# Altium PCB PULSE COUNTER.PcbDoc
Units mm, origin at the board's own origin, x right, y up, seen from the top; angles counter-clockwise.
Board outline 50 x 35 mm, 2 copper layers (Top Layer, Bottom Layer), stack 1.071 mm thick; 54 components, 28 nets, 139 pads, 17 vias.
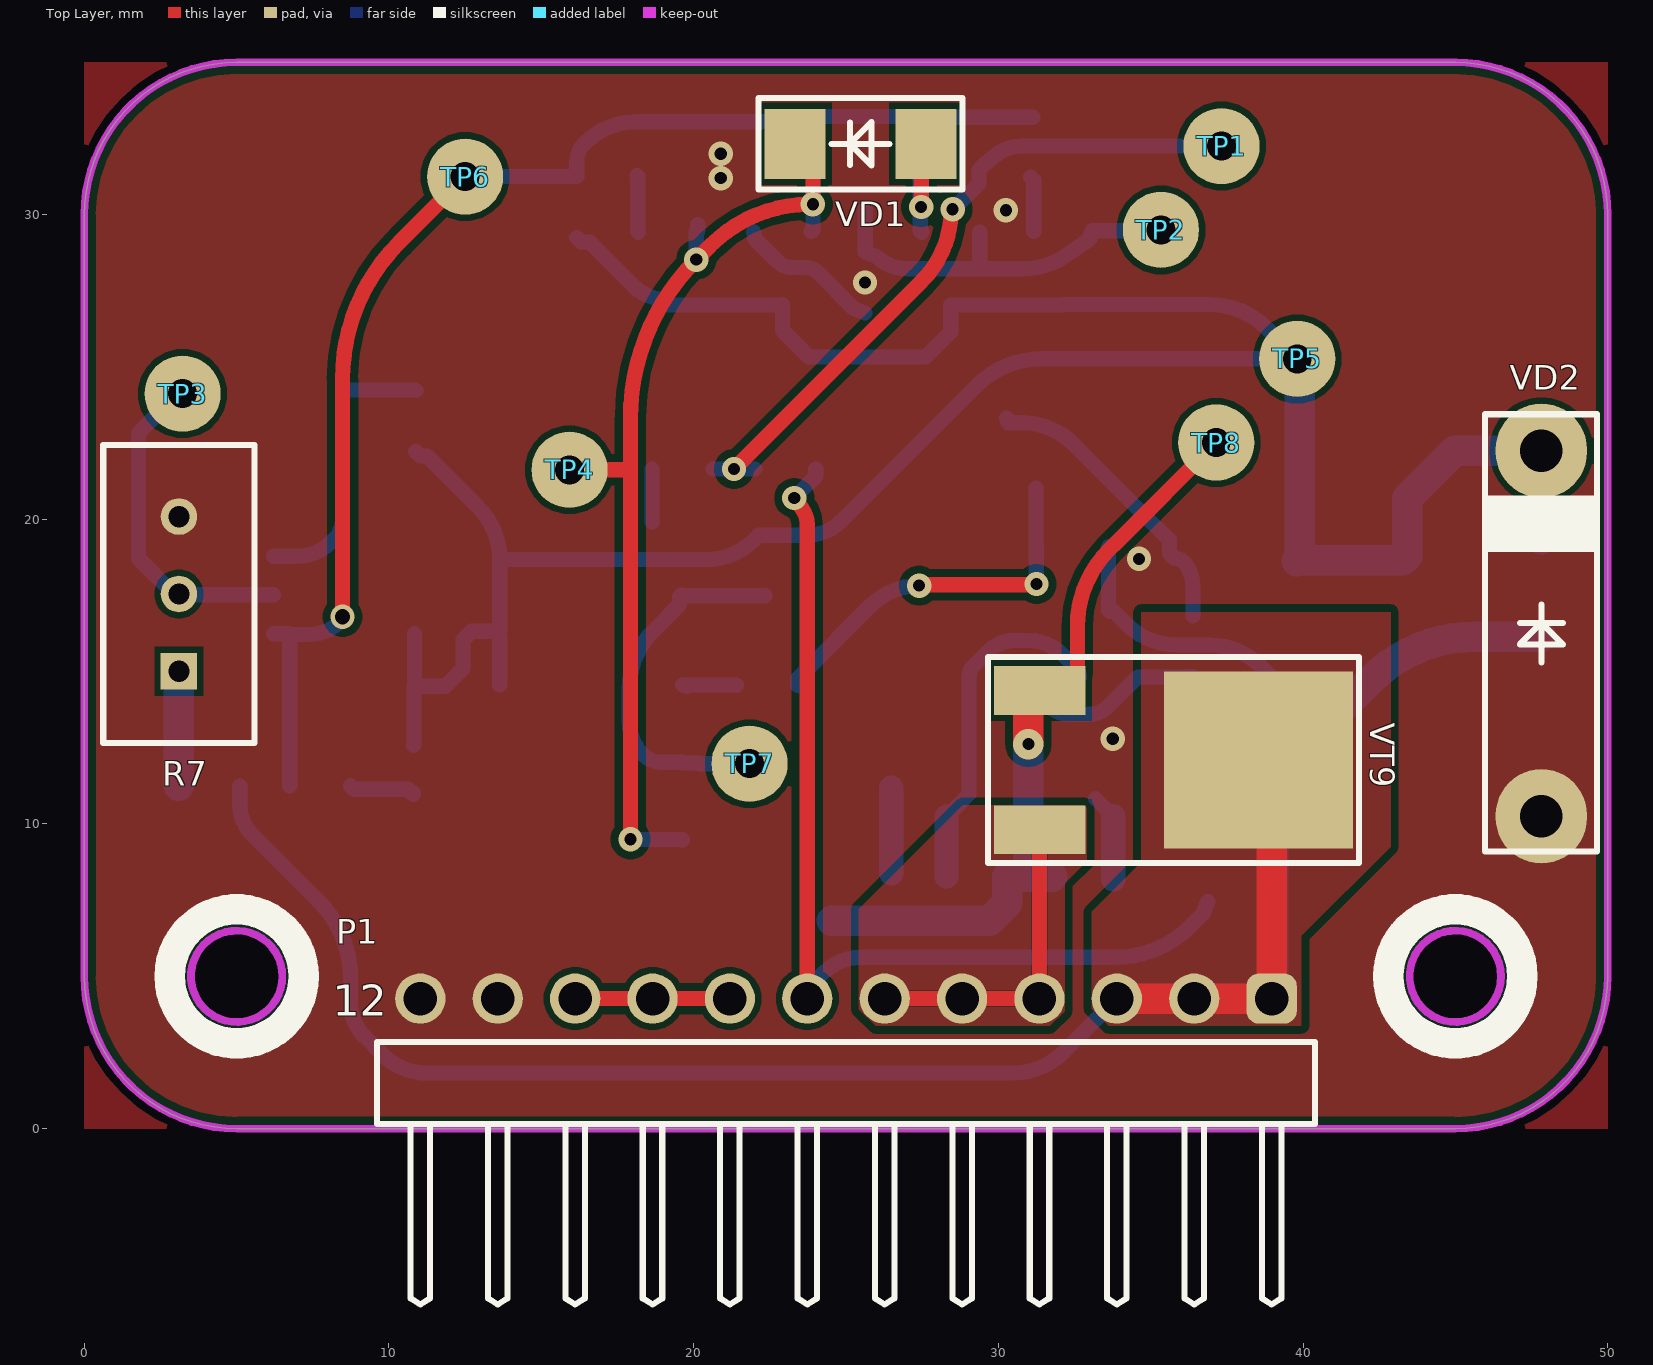
[diagram p0: Top Layer view]
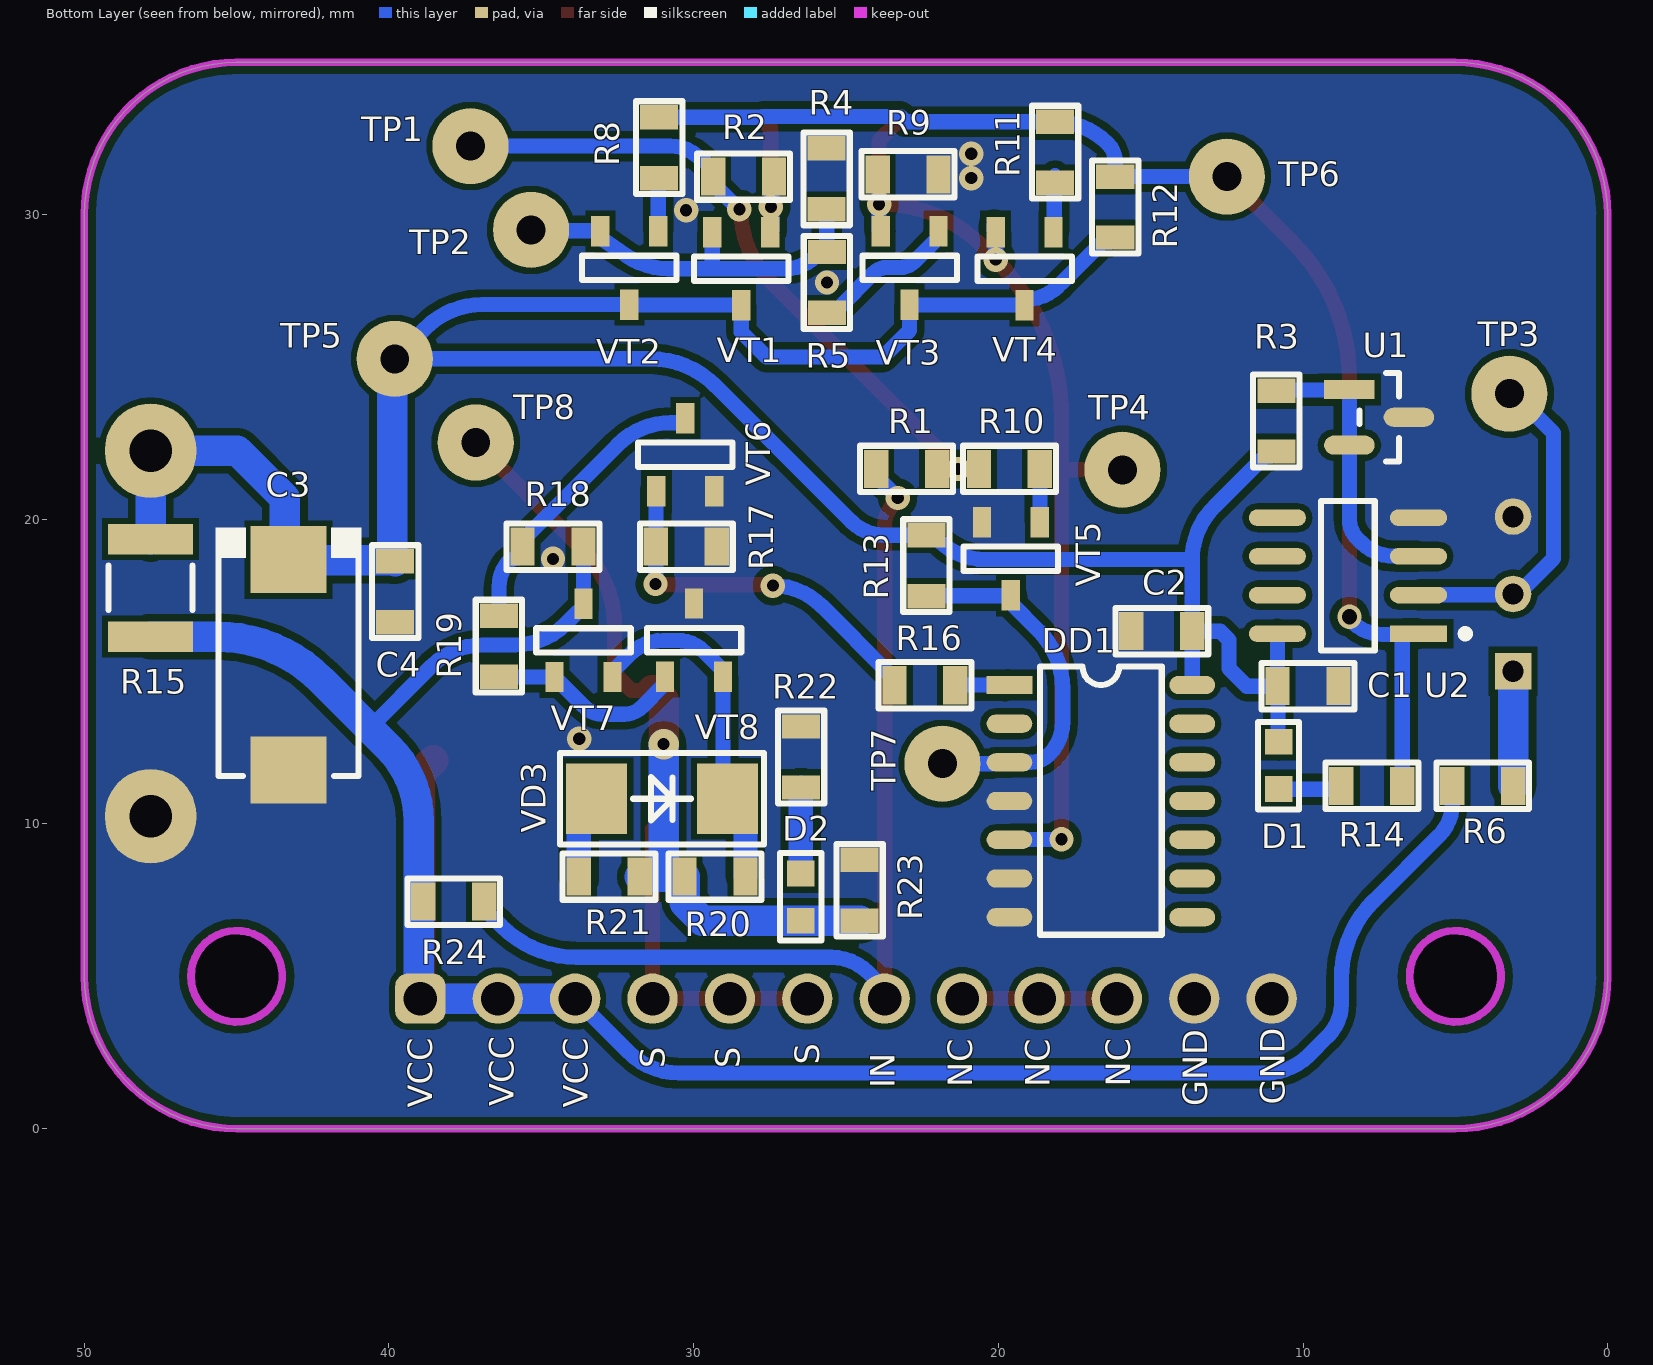
[diagram p1: Bottom Layer view, seen from below]
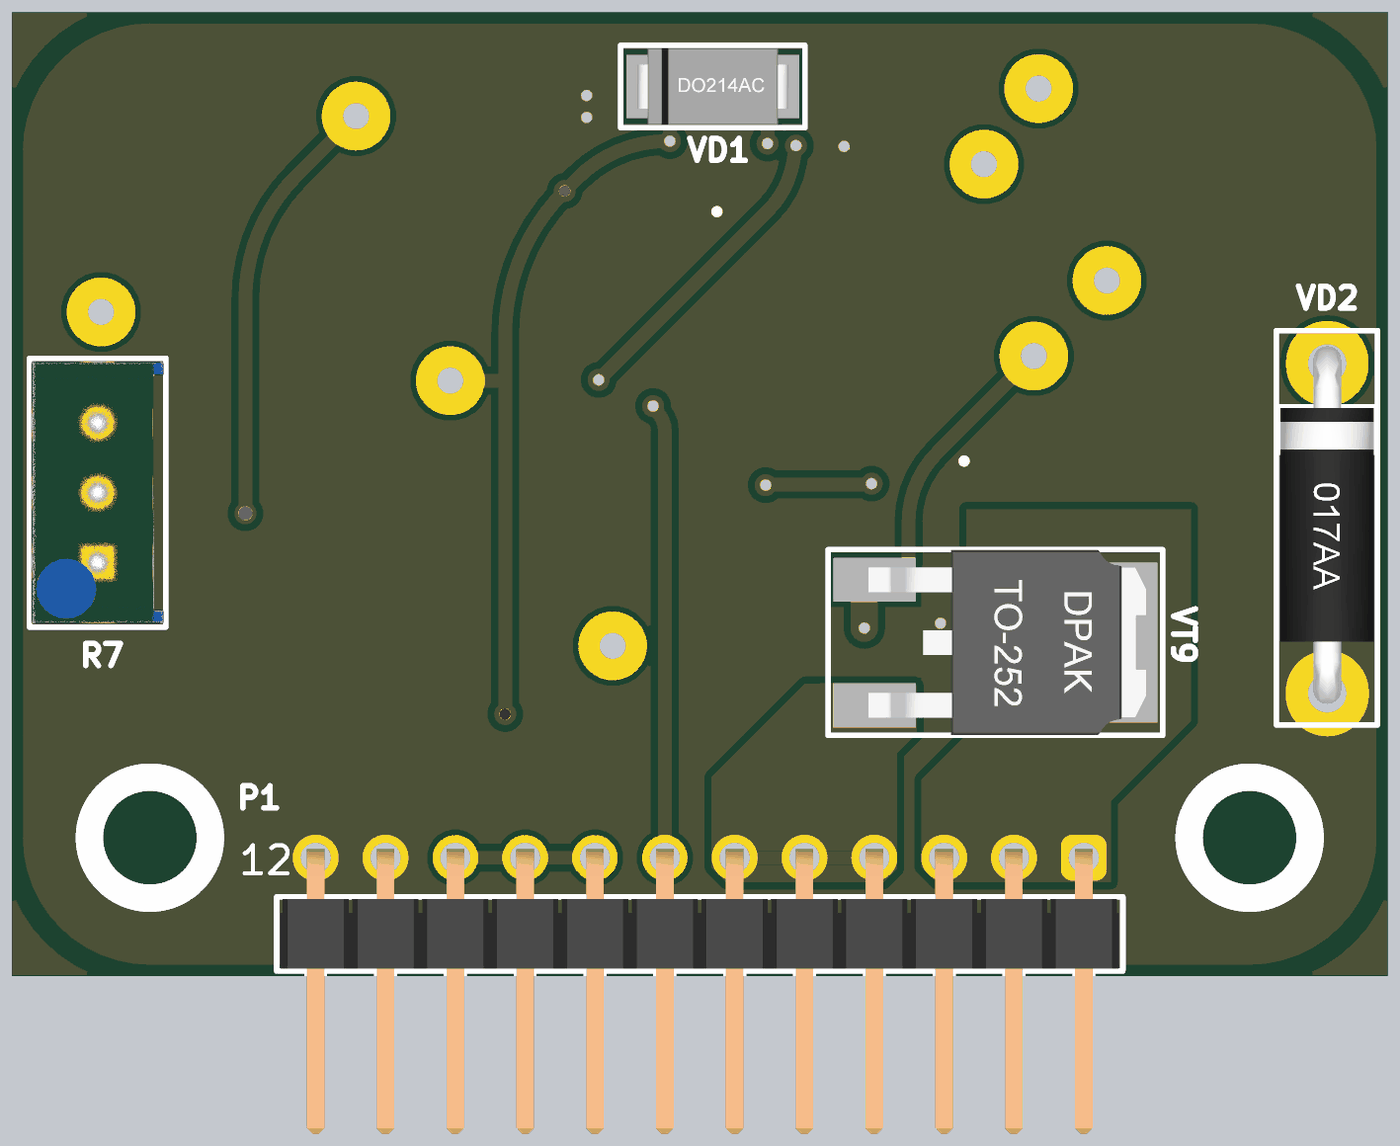
[diagram p2: 3D render of the assembled board from above, using the file's embedded part models]
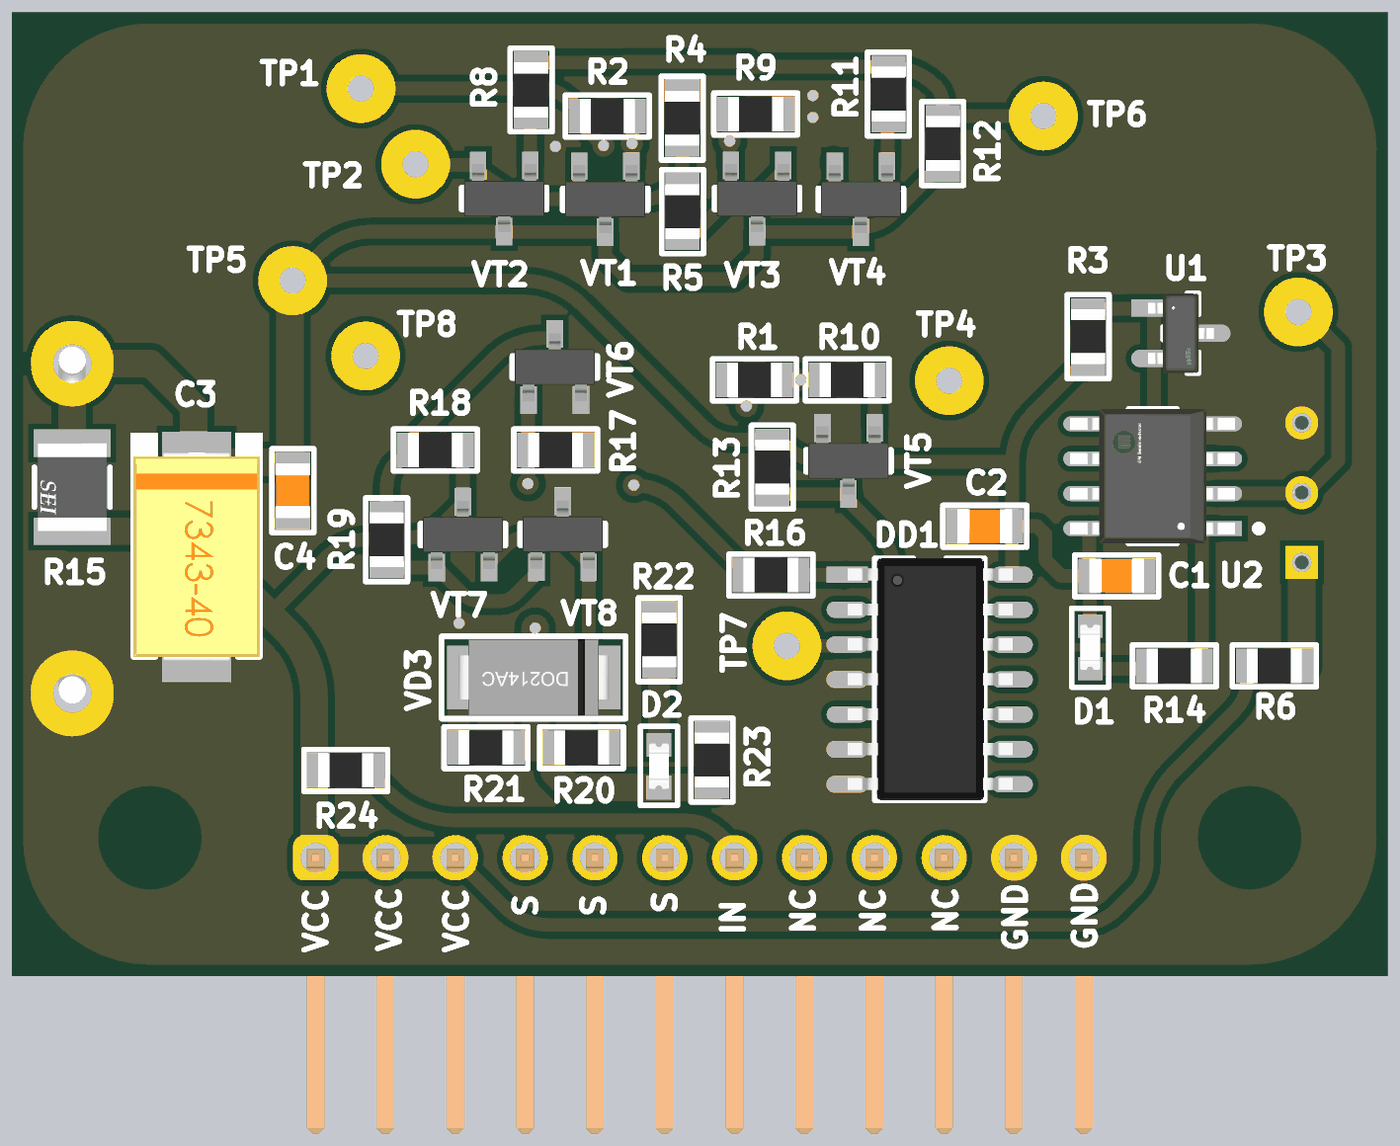
[diagram p3: 3D render of the assembled board from below, using the file's embedded part models]

## Layer stack, top to bottom
Top Solder: solder mask 0.0102, Solder Resist, Dk 3.5
Top Layer: signal copper 0.0356
Dielectric 1: dielectric 1, FR-4, Dk 4.8
Bottom Layer: signal copper 0.0356
Bottom Solder: solder mask 0.0102, Solder Resist, Dk 3.5

## Board outline
0,5 0,30 cw(c5,30) 5,35 45.021,35 45,35 cw(c45,30) 50,30 50,5 cw(c45,5) 45,0 5,0 cw(c5,5)
cut-out: 43.5,5 ccw(c45,5) 45,3.5 ccw(c45,5) 46.5,5 ccw(c45,5) 45,6.5 ccw(c45,5)
cut-out: 3.5,5 ccw(c5,5) 5,3.5 ccw(c5,5) 6.5,5 ccw(c5,5) 5,6.5 ccw(c5,5)

## Design rules (kind name [scope] priority, off if disabled: settings)
Clearance Clearance_1 [All vs InNet('GND_1')] p1: gap=0.2 ignorepadtopadclearanceinfootprint=FALSE
Clearance [All vs InNet('GND')] p2: gap=0.25 ignorepadtopadclearanceinfootprint=FALSE except(0.2: SMDPad-SMDPad SMDPad-THPad SMDPad-Via SMDPad-Fill SMDPad-Poly SMDPad-Region SMDPad-Text SMDPad-Hole THPad-THPad THPad-Via THPad-Fill THPad-Poly THPad-Region THPad-Text THPad-Hole Text-Text Text-Hole)
ComponentClearance [All] p1: gap=-3 collisioncheckmode=3 verticalgap=0.254 showdistances=FALSE
DiffPairsRouting [All] p1: maxlimit=0.254 minlimit=0.254 mostfreqgap=0.254 substack1={A23D90DD-733B-49C5-8102-56B3D284E3A0} toplayer_{a23d90dd-733b-49c5-8102-56b3d284e3a0}_minwidth=0.381 toplayer_{a23d90dd-733b-49c5-8102-56b3d284e3a0}_maxwidth=0.381 toplayer_{a23d90dd-733b-49c5-8102-56b3d284e3a0}_prefwidth=0.381 bottomlayer_{a23d90dd-733b-49c5-8102-56b3d284e3a0}_minwidth=0.381 bottomlayer_{a23d90dd-733b-49c5-8102-56b3d284e3a0}_maxwidth=0.381 bottomlayer_{a23d90dd-733b-49c5-8102-56b3d284e3a0}_prefwidth=0.381 toplayer_minwidth=0.381 toplayer_maxwidth=0.381 toplayer_prefwidth=0.381 bottomlayer_minwidth=0.381 bottomlayer_maxwidth=0.381 bottomlayer_prefwidth=0.381 substack2={0B3DB408-A969-412D-8C07-BA8AE97219D9} toplayer_{0b3db408-a969-412d-8c07-ba8ae97219d9}_minwidth=0.381 toplayer_{0b3db408-a969-412d-8c07-ba8ae97219d9}_maxwidth=0.381 toplayer_{0b3db408-a969-412d-8c07-ba8ae97219d9}_prefwidth=0.381 bottomlayer_{0b3db408-a969-412d-8c07-ba8ae97219d9}_minwidth=0.381 bottomlayer_{0b3db408-a969-412d-8c07-ba8ae97219d9}_maxwidth=0.381 bottomlayer_{0b3db408-a969-412d-8c07-ba8ae97219d9}_prefwidth=0.381 substack3={378827E6-B38F-4565-9D2F-710D8D441C30} toplayer_{378827e6-b38f-4565-9d2f-710d8d441c30}_minwidth=0.381 toplayer_{378827e6-b38f-4565-9d2f-710d8d441c30}_maxwidth=0.381 toplayer_{378827e6-b38f-4565-9d2f-710d8d441c30}_prefwidth=0.381 bottomlayer_{378827e6-b38f-4565-9d2f-710d8d441c30}_minwidth=0.381 bottomlayer_{378827e6-b38f-4565-9d2f-710d8d441c30}_maxwidth=0.381 bottomlayer_{378827e6-b38f-4565-9d2f-710d8d441c30}_prefwidth=0.381 substack4={1E65D4A7-266F-4925-B814-5E9C4A66F8EE} toplayer_{1e65d4a7-266f-4925-b814-5e9c4a66f8ee}_minwidth=0.381 toplayer_{1e65d4a7-266f-4925-b814-5e9c4a66f8ee}_maxwidth=0.381 toplayer_{1e65d4a7-266f-4925-b814-5e9c4a66f8ee}_prefwidth=0.381 bottomlayer_{1e65d4a7-266f-4925-b814-5e9c4a66f8ee}_minwidth=0.381 bottomlayer_{1e65d4a7-266f-4925-b814-5e9c4a66f8ee}_maxwidth=0.381 bottomlayer_{1e65d4a7-266f-4925-b814-5e9c4a66f8ee}_prefwidth=0.381 substack5={93C5D03E-862D-45F8-9871-970EEA9B3F11} toplayer_{93c5d03e-862d-45f8-9871-970eea9b3f11}_minwidth=0.381 toplayer_{93c5d03e-862d-45f8-9871-970eea9b3f11}_maxwidth=0.381 toplayer_{93c5d03e-862d-45f8-9871-970eea9b3f11}_prefwidth=0.381 bottomlayer_{93c5d03e-862d-45f8-9871-970eea9b3f11}_minwidth=0.381 bottomlayer_{93c5d03e-862d-45f8-9871-970eea9b3f11}_maxwidth=0.381 bottomlayer_{93c5d03e-862d-45f8-9871-970eea9b3f11}_prefwidth=0.381 maxuncoupledlength=12.7
Height [All] p1: minheight=0 maxheight=50 prefheight=33
HoleSize [All] p1: absolutevalues=TRUE maxlimit=6 minlimit=0.01 maxpercent=80.000 minpercent=20.000
HoleToHoleClearance [All] p1: gap=0.1 allowstackedmicrovias=TRUE
MinimumSolderMaskSliver [All] p1: minsoldermaskwidth=0.1
PlaneClearance [All] p1: clearance=0.7
PlaneConnect [All] p1: planeconnectstyle=Direct reliefexpansion=0.5 reliefentries=4 reliefconductorwidth=0.5 reliefairgap=0.15
PolygonConnect VQFN20 [HasFootprint('VQFN20')] p1: connectstyle=Direct reliefconductorwidth=0.254 reliefentries=4 polygonreliefangle="90 Angle" airgapwidth=0.254
PolygonConnect [All] p2: connectstyle=Direct reliefconductorwidth=0.3 reliefentries=4 polygonreliefangle="90 Angle" airgapwidth=0.15
RoutingVias [All] p1: holewidth=0.1 width=0.1 viastyle="Through Hole" minholewidth=0 minwidth=0.3 maxholewidth=2 maxwidth=4
ShortCircuit [All] p1: allowed=TRUE
SilkToSolderMaskClearance [IsPad] p1: minsilkscreentomaskgap=0.1 clearancetoexposedcopper=TRUE
SolderMaskExpansion SolderMaskExpansion_Via [IsVia] p1: expansion=0.102 istentingtop=TRUE
SolderMaskExpansion [All] p2: expansion=0.01 istentingtop=FALSE
UnRoutedNet [All] p1: checkbadconnections=TRUE
Width [All] p1: maxlimit=5 minlimit=0.2 preferedwidth=0.3 substack1={A23D90DD-733B-49C5-8102-56B3D284E3A0} substack2={0B3DB408-A969-412D-8C07-BA8AE97219D9} substack3={378827E6-B38F-4565-9D2F-710D8D441C30} substack4={1E65D4A7-266F-4925-B814-5E9C4A66F8EE} substack5={93C5D03E-862D-45F8-9871-970EEA9B3F11}
19 further rules are at their usual default settings.

## Components (designator, comment, footprint, x,y, rotation, side; value= is the part's Value field where it differs from the comment)
C1 "0.1uF" CAP-0805 9.836,14.525 r0 bottom
C2 "0.1uF" CAP-0805 14.635,16.329 r180 bottom
C3 "CAP-POLAR" CAP-TAN-D 43.3,15.225 r270 bottom
C4 "0.1uF" CAP-0805 39.8,17.625 r90 bottom
D1 "151031YS06000" LED-0603 10.8,11.925 r270 bottom
D2 "151031YS06000" LED-0603 26.486,7.6 r90 bottom
DD1 "CD4013" SO14-150 16.635,10.754 r180 bottom
P1 "61301211021" 61301211021 25,1.5 r0 top locked
R1 "1K" RES-0805 23.01,21.654 r0 bottom
R2 "10K" RES-0805 28.363,31.25 r180 bottom
R3 "1K" RES-0805 10.875,23.225 r270 bottom
R4 "1K" RES-0805 25.638,31.175 r270 bottom
R5 "10K" RES-0805 25.626,27.775 r270 bottom
R6 "20K" RES-0805 4.1,11.25 r0 bottom
R7 "10K" Bourns_3296W_MFG 3.1,17.55 r0 top
R8 "10K" RES-0805 31.132,32.2 r270 bottom
R9 "1K" RES-0805 22.963,31.325 r0 bottom
R10 "10K" RES-0805 19.635,21.654 r180 bottom
R11 "10K" RES-0805 18.138,32.05 r270 bottom
R12 "1K" RES-0805 16.163,30.25 r270 bottom
R13 "1K" RES-0805 22.36,18.479 r90 bottom
R14 "470" RES-0805 7.739,11.252 r0 bottom
R15 "RMCF1210JT51R0" FP-RMCF1210-MFG 47.825,17.75 r270 bottom
R16 "1K" RES-0805 22.41,14.554 r0 bottom
R17 "20k" RES-0805 30.241,19.104 r0 bottom
R18 "1K" RES-0805 34.616,19.104 r0 bottom
R19 "1K" RES-0805 36.391,15.837 r90 bottom
R20 "47" RES-0805 29.3,8.275 r180 bottom
R21 "47" RES-0805 32.775,8.275 r0 bottom
R22 "2K" RES-0805 26.475,12.2 r270 bottom
R23 "1K" RES-0805 24.555,7.825 r270 bottom
R24 "10K" RES-0805 37.875,7.45 r0 bottom
TP1 "" Test_Point 37.325,32.25 r0 top
TP2 "" Test_Point 35.338,29.5 r0 top
TP3 "" Test_Point 3.225,24.125 r0 top
TP4 "" Test_Point 15.925,21.625 r0 top
TP5 "" Test_Point 39.811,25.268 r0 top
TP6 "" Test_Point 12.5,31.25 r0 top
TP7 "" Test_Point 21.833,11.979 r90 top
TP8 "" Test_Point 37.153,22.522 r0 top
U1 "TL431" TL431_SOT-23-3(A) 7.5,23.35 r180 bottom
U2 "LM393" FP-751-07-IPC_C 8.525,18.15 r0 bottom
VD1 "DIODE" "DO-214AC, SMA" 25.475,32.325 r0 top
VD2 "5V" DO-017AA 47.825,16.25 r270 top
VD3 "DIODE" "DO-214AC, SMA" 31.041,10.829 r0 bottom
VT1 "BC847-BEC" SOT23-3 28.438,28.225 r270 bottom
VT2 "BC847-BEC" SOT23-3 32.113,28.25 r270 bottom
VT3 "BC847-BEC" SOT23-3 22.913,28.25 r270 bottom
VT4 "BC847-BEC" SOT23-3 19.138,28.225 r270 bottom
VT5 "BC847-BEC" SOT23-3 19.588,18.708 r270 bottom
VT6 "BC847-BEC" SOT23-3 30.275,22.122 r90 bottom
VT7 "BC847-BEC" SOT23-3 33.616,16.025 r90 bottom
VT8 "BC857-BEC" SOT23-3 29.988,16.037 r90 bottom
VT9 "MOSFET-P-CH-DPAK" DPAK 34.95,12.1 r270 top

## Footprints (in the part's own frame and the unit in brackets; to place one, negate y for a bottom-side part, rotate by r counter-clockwise, add the part's x,y. Pads: shape width x height; smd on the part's side, far side on the other; paste and mask are expansions set on the pad)
61301211021 [mm] "Pin Header, pitch 2.54 mm, THT, Angled, single row, 12p"
  rrect50% 1.65x1.65 hole 1.1: 1(13.97,2.77)
  round 1.65 hole 1.1: 2(11.43,2.77) 3(8.89,2.77) 4(6.35,2.77) 5(3.81,2.77) 6(1.27,2.77) 7(-1.27,2.77) 8(-3.81,2.77) 9(-6.35,2.77) 10(-8.89,2.77) 11(-11.43,2.77) 12(-13.97,2.77)
  silkscreen extent -15.39,-7.27 15.39,1.35, body extent -15.24,-7.27 15.24,3.09, height 2.58
Bourns_3296W_MFG [mm]
  rect 1.2x1.2 hole 0.7 paste-2539.97 mask+0: 1(0.005,-2.54)
  round 1.2 hole 0.7 paste-2539.97 mask+0: 2(0.005,0) 3(0.005,2.54)
  silkscreen extent -2.48,-4.89 2.48,4.89, body extent -2.58,-4.99 2.58,4.99, height 0.25
CAP-0805 [mm]
  rect 0.8x1.25 smd mask+0.015: 1(-1,0) 2(1,0)
  silkscreen extent -1.52,-0.76 1.52,0.76, body extent -1,-0.62 1,0.63, height 0.8
CAP-TAN-D [mm]
  rect 2.2x2.5 smd: 1(-3.45,0) 2(3.45,0)
  silkscreen extent -4.5,-2.4 3.65,2.4, body extent -3.8,-2.3 3.8,2.3, height 4
DO-017AA [mm]
  oval 3.1x3 hole 1.4: 1(-6,0) 2(6,0)
  silkscreen extent -7.2,-1.85 7.15,1.83, body extent -6.63,-1.7 6.37,1.7, height 3.4
"DO-214AC, SMA" [mm]
  rect 2x2.3 smd: 1(-2.15,0) 2(2.15,0)
  silkscreen extent -3.35,-1.5 3.35,1.5, body extent -2.74,-1.4 2.74,1.4, height 2.24
DPAK [mm]
  rect 1.6x3 smd: 1(-2.285,-3.59) 3(2.285,-3.59)
  rect 5.8x6.2 smd: 4(0,3.59)
  silkscreen extent -3.37,-5.28 3.37,6.89, body extent -3.37,-3.81 3.37,6.29, height 2.37
FP-751-07-IPC_C [mm]
  rect 1.874x0.543 smd paste+0 mask+0: 1(-2.316,1.905)
  rrect100% 1.874x0.543 smd paste+0 mask+0: 2(-2.316,0.635) 3(-2.316,-0.635) 4(-2.316,-1.905) 5(2.316,-1.905) 6(2.316,-0.635) 7(2.316,0.635) 8(2.316,1.905)
  silkscreen extent -3.98,-2.45 0.88,2.45, body extent -3,-2.45 3,2.45, height 1.75
FP-RMCF1210-MFG [mm]
  rect 1x2.8 smd paste+0 mask+0: 1(-1.6,0) 2(1.6,0)
  silkscreen extent -0.72,-1.38 0.72,1.38, body extent -1.6,-1.25 1.6,1.25, height 0.7
LED-0603 [mm]
  rect 0.85x0.9 smd: 1(-0.775,0) 2(0.775,0)
  silkscreen extent -1.43,-0.67 1.45,0.67, body extent -0.82,-0.36 0.83,0.36, height 0.68
RES-0805 [mm]
  rect 0.8x1.25 smd mask+0.015: 1(-1,0) 2(1,0)
  silkscreen extent -1.52,-0.76 1.52,0.76, body extent -1,-0.62 1,0.63, height 0.6
SO14-150 [mm]
  rect 1.5x0.6 smd: 1(-3,3.81)
  oval 1.5x0.6 smd: 2(-3,2.54) 3(-3,1.27) 4(-3,0) 5(-3,-1.27) 6(-3,-2.54) 7(-3,-3.81) 8(3,-3.81) 9(3,-2.54) 10(3,-1.27) 11(3,0) 12(3,1.27) 13(3,2.54) 14(3,3.81)
  silkscreen extent -2,-4.39 2,4.41, body extent -2.97,-4.39 3.03,4.41, height 1.7
SOT23-3 [mm]
  rect 1x0.6 smd: 1(-1.2,0.95) 2(-1.2,-0.95) 3(1.2,0)
  silkscreen extent -0.4,-1.55 0.4,1.55, body extent -1.25,-1.46 1.23,1.46, height 1.02
Test_Point [mm]
  round 2.5 hole 0.95: 1(0,0)
TL431_SOT-23-3(A) [mm]
  rect 1.659x0.627 smd paste+0 mask+0: 1(-0.977,0.915)
  rrect100% 1.659x0.627 smd paste+0 mask+0: 2(-0.977,-0.915) 3(0.977,0)
  silkscreen extent -0.65,-1.45 0.65,1.45, body extent -1.2,-1.45 1.2,1.45, height 1.1

## Part data
C1 C2 C4: library part CAP-NON-POLAR
D1 D2: library part LED, "WURTH ELEKTRONIK - 151031YS06000 - LED, Yellow, Through Hole, T-1 (3mm), 30 mA, 2 V, 590 nm", Manufacturer_Name="Wurth Elektronik", Mouser Part Number=710-151031YS06000, Datasheet Link=https://katalog.we-online.de/led/datasheet/151031YS06000.pdf, Geometry.Height=5.5mm, Manufacturer_Part_Number=151031YS06000, Mouser Price/Stock=https://www.mouser.co.uk/ProductDetail/Wurth-Elektronik/151031YS06000?qs=LlUlMxKIyB3xSYYW%252BcuBiQ%3D%3D
P1: "WR-PHD Pin Header, THT, Angled, pitch 2.54mm, 1 Row, 12P", Contact Resistance=20mΩ, Manufacturer="Wurth Elektronik", Operating Temperature Max=105°C, Operating Temperature Min=-40°C, Rated Current=3A, Withstanding Voltage=500V, Working Voltage=250V, Category="Board-to-Board Connectors", ComponentLink1Description="Website Link", ComponentLink1URL=https://www.we-online.com/redexpert/article/61301211021?ad, ComponentLink2Description="Datasheet Link", ComponentLink2URL=https://www.we-online.com/redexpert/spec/61301211021?ad, Gender="Pin Header", Manufacturer Part Number=61301211021, Match Code=WR-PHD, Mount="Through Hole", Number of Pins=12, Number of Rows=1, Orientation=Angled, Packaging=Bag, Pitch=2.54mm
R1 R2 R3 R4 R5 R6 R8 R9 R10 R11 R12 R13 R22 R23 R24: library part RES-CONST
R7: library part RES_Adj
R14: library part RES-CONST, "1K"
R15: library part CMP-26527-006785-1, "51Ω ±5% 0.5W 1210 Thick Film Chip Resistor AEC-Q200 compliant", Case Code (Imperial)=1210, Case Code (Metric)=3225, Max Operating Temperature=155°C, Max Power Dissipation=500mW, Min Operating Temperature=-55°C, Resistance=51R, Resistor Type="Thick Film", Temperature Coefficient=200ppm/°C, Tolerance=5%, Case/Package=1210, Contact Plating=Tin, Features="Automotive AEC-Q200", Height=0.028inch, Lead Free="Lead Free", Length=0.126inch, Mount="Surface Mount", Number of Terminations=2, Packaging="Tape and Reel", Radiation Hardening=No, RoHS Compliant=Yes, Series=RMCF, Width=0.098inch
R16 R17 R18 R19 R20 R21: library part RES-CONST, "10K"
TP1 TP2 TP3 TP4 TP5 TP6 TP7 TP8: library part TP_PCB?, "Test_Point"
U1: library part TL431_SOT-23-3, "TL431_SOT-23-3"
U2: library part CMP-1310-00291-2, "IC OPAMP GP 2 CIRCUIT 8SOIC", Case/Package=SOIC, Dual Supply Voltage=9V, Input Bias Current=250nA, Input Offset Voltage (Vos)=7mV, Max Dual Supply Voltage=16V, Max Operating Temperature=70°C, Max Supply Voltage=32V, Min Dual Supply Voltage=1.5V, Min Operating Temperature=0°C, Min Supply Voltage=3V, Nominal Supply Current=1.2mA, Operating Supply Current=1.5mA, Output Current=40mA, Package Quantity=2500, Power Supply Rejection Ratio (PSRR)=65dB, Voltage Gain=100dB, Bandwidth=1MHz, Common Mode Rejection Ratio=65dB, Contact Plating=Tin, Gain Bandwidth Product=1MHz, Halogen Free="Halogen Free", Height=1.5mm, Lead Free="Lead Free", Length=5mm, Number of Amplifiers=2, Number of Channels=2, Number of Circuits=2, Number of Elements=2, Number of Pins=8, Operating Supply Voltage=16V, Output Current per Channel=40mA, Packaging="Tape and Reel", Radiation Hardening=No, REACH SVHC="No SVHC", Slew Rate=0.6V/µs, Width=4mm
VD2: library part ZENER

## Via types
v1: diameter 0.8, hole 0.4, Top Layer to Bottom Layer, tented both sides, 15 vias
v2: diameter 1, hole 0.4, Top Layer to Bottom Layer, tented both sides, 1 vias
v3: diameter 0.8, hole 0.5, Top Layer to Bottom Layer, tented both sides, 1 vias

## Nets (pads, with @x,y where several pads share a name; then routed paths per layer and width w, separated by ;. In a path a pad name is that pad's centre, name@x,y a point inside that pad or via, vN(x,y) a via of type N, cw(c..) or ccw(c..) an arc to the next point about the centre after c; other vN are vias at no path point)
+5: C1.2 C2.2 C3.1 C4.2 D1.1 DD1.14 R3.2 R12.2 R13.2 R15.1 TP5.1 U2.8 VD2.1 VT1.3 VT2.3 VT3.3 VT4.3 | length 92.5
  Bottom Layer w0.5: D1.1@10.8,12.575 10.818,12.593 10.818,14.507 C1.2 11.85,14.525 12.425,15.1 12.425,16.036 12.718,16.329 C2.2 13.635,18.679 ; C1.2@10.839,14.752 10.839,16.243 U2.8 ; R3.2 11.025,22.075 11.25,22.075 12.918,20.407 12.92,20.405 cw(c11.193,18.679) 13.635,18.679 ; DD1.14 C2.2@13.635,16.099 ; R12.2 16.313,29.1 16.588,29.1 17.877,27.811 18.033,27.655 ccw(c19.088,28.709) VT4.3@19.088,27.218 ; VT4.3@19.15,27.038 22.9,27.038 VT3.3 22.918,27.045 22.918,26.195 23.788,25.325 27.613,25.325 28.438,26.149 VT1.3 28.45,27.038 32.1,27.038 VT2.3 32.163,27.05 33.064,27.05 36.934,27.05 cw(c36.934,24.408) 38.801,26.278 TP5.1 31.431,25.268 31.429,25.268 ccw(c31.429,22.222) 29.274,24.374 24.845,19.945 cw(c23.722,21.065) 23.723,19.479 22.735,19.479 22.135,19.479 21.985,19.329 cw(c20.418,20.893) 20.418,18.679 20.416,18.679 13.635,18.679
  Bottom Layer w1: TP5.1 39.9,25.179 39.9,18.725 C4.2 39.825,18.65 43.275,18.65 43.414,18.789 43.414,20.689 44.975,22.25 VD2.1 R15.1
GND: C1.1 C2.1 C3.2 C4.1 DD1.4 DD1.6 DD1.7 P1.11 P1.12 R4.1 R7.3 R9.1 R17.1 R22.1 R23.1 U1.3 U2.4 VD2.2 VT5.2 VT6.2 VT8.3
  other v1: 33.755,12.8 34.616,18.7 25.626,27.775 30.248,30.146 20.888,31.2 20.886,32
NetD1_2: D1.2 R14.2 | length 2.2
  Bottom Layer w0.5: R14.2 8.853,11.139 10.636,11.139 10.8,10.975 D1.2@10.8,11.025
NetD2_1: D2.1 R20.1 R21.1 R23.2 TP8.1 VT9.1 | length 25.5
  Top Layer w0.5: VT9.1 32.045,14.385 32.595,14.935 32.595,16.156 32.595,16.484 32.595,16.485 cw(c36.163,16.485) 33.641,19.009 33.874,19.243 TP8.1
  Top Layer w1: v2(30.986,12.625) 30.986,14.085 31.286,14.385 VT9.1
  Bottom Layer w1: R23.2@24.525,6.825 29.714,6.825 30.3,7.411 R20.1 R21.1 ; v2(30.986,12.625) 30.989,12.622 30.989,8.275
NetD2_2: D2.2 R22.2 | length 2.8
  Bottom Layer w0.5: R22.2 R22.2@26.48,11.195 ; D2.2@26.48,8.38 D2.2
  Bottom Layer w0.8: D2.2@26.48,8.38 R22.2@26.48,11.195
NetDD1_1: DD1.1 R16.1 | length 1.8
  Bottom Layer w0.5: DD1.1 19.736,14.564 19.775,14.525 19.809,14.559 21.405,14.559 R16.1
NetDD1_3: DD1.3 R13.1 TP7.1 VT5.3 | length 12.9
  Bottom Layer w0.5: DD1.3 19.185,12.024 18.954,12.024 cw(c18.957,12.908) 18.331,12.283 cw(c19.402,13.353) 17.888,13.353 17.888,13.355 17.888,14.438 17.888,14.439 cw(c20.569,14.439) 18.675,16.337 19.538,17.201 19.538,17.458 VT5.3 19.603,17.494 R13.1@22.345,17.494 ; DD1.3@19.654,12.005 20.175,12.005 20.201,11.979 22.375,11.979 TP7.1@22.45,12.054 ; TP7.1@21.018,11.464 TP7.1@21.033,11.479
NetDD1_5: DD1.5 R9.2 TP4.1 VD1.1 VT3.2 VT4.2 | length 33.7
  Top Layer w0.5: TP4.1 17.925,21.625 ; v1(17.925,9.5) 17.925,21.625 ; VD1.1@23.35,33 23.913,32.437 v1(23.913,30.34) 23.815,30.34 ccw(c23.815,25.724) 20.551,28.988 v1(20.088,28.525) ccw(c25.309,23.303) 17.925,23.303 17.925,23.302 17.925,21.625
  Bottom Layer w0.5: v1(17.925,9.5) 17.933,9.492 19.627,9.492 DD1.5 ; v1(20.088,28.525) VT4.2 20.138,29.475 VT4.2@20.138,29.675 ; VT3.2 23.913,29.5 v1(23.913,30.34) 23.913,31.275 R9.2
NetR1_1: R1.1 R2.1 R10.1 TP1.1 | length 22.6
  Top Layer w0.5: v1(21.323,21.654) 27.492,27.823 ccw(c25.2,30.119) 28.398,29.574 v1(28.5,30.175)
  Bottom Layer w0.5: R10.1 v1(21.323,21.654) R1.1 ; v1(28.5,30.175) 28.513,30.175 29.363,31.025 29.363,31.475 29.513,31.625 29.871,31.924 cw(c30.77,30.846) 30.77,32.25 TP1.1@37.291,32.25
NetR2_2: R2.2 VD1.2 VT1.1 | length 4.7
  Top Layer w0.5: v1(27.466,30.25) 27.466,32.816 VD1.2@27.65,33
  Bottom Layer w0.5: R2.2 27.438,31.175 27.438,29.475 VT1.1
NetR3_1: R3.1 U1.1 U1.2 U2.3 | length 9.6
  Bottom Layer w0.5: U2.3 6.874,18.785 6.972,18.785 ccw(c6.971,20.389) 8.106,19.256 8.219,19.369 ccw(c7.597,19.991) 8.477,19.991 U1.1 8.497,24.245 10.855,24.245 R3.1
NetR4_2: R4.2 R5.1 TP2.1 VT1.2 VT2.2 | length 12.9
  Bottom Layer w0.5: R4.2 25.632,30.169 25.632,28.781 R5.1 26,28.625 26.122,28.527 ccw(c26.979,29.591) 26.979,28.225 27.239,28.225 29.363,28.225 ; VT1.2 29.388,28.25 29.363,28.225 ; TP2.1 35.313,29.475 33.088,29.475 VT2.2 33.013,29.2 32.198,28.647 cw(c30.825,30.67) 30.825,28.225 30.823,28.225 29.363,28.225
NetR5_2: R5.2 VT3.1 | length 4.8
  Bottom Layer w0.5: VT3.1 22.013,29.2 22.75,28.463 ccw(c23.236,28.95) 23.235,28.262 23.679,28.262 cw(c23.678,27.692) 23.682,28.262 cw(c23.678,27.692) 24.08,28.095 25.25,26.925 R5.2
NetR6_1: R6.1 R7.1 | length 3.8
  Bottom Layer w1: R6.1 3.103,11.252 3.103,15.008 R7.1
NetR7_2: R7.2 TP3.1 U2.2 | length 11.1
  Bottom Layer w0.5: R7.2@3.027,17.523 6.201,17.523 U2.2 ; R7.2 2.941,17.55 1.775,18.716 1.775,22.837 3.063,24.125 TP3.1
NetR8_1: R8.1 R11.1 R12.1 R14.1 TP6.1 U2.1 | length 43.1
  Top Layer w0.5: v3(8.475,16.8) 8.475,24.603 cw(c14.806,24.603) 10.331,29.081 TP6.1
  Bottom Layer w0.5: U2.1 6.717,16.245 U2.1@6.739,16.223 ; R14.1 U2.1@6.739,16.223 ; v3(8.475,16.8) cw(c8.001,16.959) 8.342,16.593 cw(c7.398,17.611) 7.4,16.223 6.896,16.223 U2.1@6.739,16.223 ; TP6.1 R12.1 16.163,31.4 16.163,31.73 cw(c17.021,31.729) 16.414,32.336 cw(c18.138,30.613) 17.763,33.021 R11.1 23.038,33.05 23.213,33.225 27.738,33.225 27.763,33.2 R8.1
NetR8_2: R8.2 VT2.1 | length 1.8
  Bottom Layer w0.5: R8.2@31.063,31.238 31.163,31.137 VT2.1
NetR10_2: R10.2 VT5.1 | length 1.7
  Bottom Layer w0.5: R10.2 18.637,21.652 18.637,19.91 VT5.1
NetR11_2: R11.2 VT4.1 | length 1.9
  Bottom Layer w0.5: R11.2@18.138,31.275 18.163,31.25 18.163,29.45 VT4.1
NetR16_2: R16.2 R17.2 VT6.1 | length 12.4
  Top Layer w0.5: v1(27.4,17.825) 27.427,17.852 31.224,17.852 v1(31.251,17.879)
  Bottom Layer w0.5: R16.2 23.41,14.779 23.56,14.929 23.573,14.929 25.81,17.166 cw(c27.4,15.578) v1(27.4,17.825) ; VT6.1@31.238,21.029 31.239,21.027 31.239,19.105 R17.2 31.246,19.099 31.246,17.884 v1(31.251,17.879)
NetR18_2: R18.2 R19.2 VT6.3 | length 9.8
  Bottom Layer w0.5: VT6.3 30.325,23.173 30.74,23.173 cw(c30.74,20.698) 32.489,22.449 32.492,22.446 35.459,19.479 35.466,19.479 35.616,19.329 35.616,18.879 35.766,18.729 cw(c35.755,18.229) 36.175,18.499 cw(c35.025,17.763) 36.391,17.763 36.391,16.987 R19.2
NetR19_1: R19.1 VT7.1 VT8.1 | length 6.5
  Bottom Layer w0.5: VT8.1 30.988,14.587 30.988,14.557 31.7,13.844 ccw(c32.282,14.426) 32.281,13.604 32.982,13.604 ccw(c32.982,14.479) 33.601,13.86 34.516,14.775 VT7.1 36.154,14.825 36.166,14.837 R19.1
NetR20_2: R20.2 VD3.1 VT7.2 VT8.2 | length 11.6
  Bottom Layer w0.5: VD3.1@28.3,10.238 VD3.1 29.038,10.975 VT8.2 29.088,15.087 29.659,15.658 cw(c30.545,14.772) 30.545,16.025 30.986,16.025 30.989,16.025 cw(c30.988,14.439) 32.109,15.56 32.595,15.075 32.616,15.075 VT7.2
  Bottom Layer w0.8: R20.2 VD3.1@28.3,10.238
NetR21_2: R21.2 VD3.2 | length 2.9
  Bottom Layer w0.5: VD3.2 VD3.2@33.766,10.254
  Bottom Layer w0.8: R21.2@33.766,8.179 VD3.2@33.766,10.254
PULSE_IN: P1.7 R1.2 R24.1 | length 32.3
  Top Layer w0.5: v1(23.304,20.7) 23.558,20.348 cw(c22.826,19.818) 23.73,19.818 P1.7
  Bottom Layer w0.5: v1(23.304,20.7) 23.304,20.723 24.01,21.429 R1.2 ; P1.7 23.73,4.581 24.265,5.116 cw(c25.493,3.888) 25.493,5.625 33.837,5.625 33.838,5.625 ccw(c33.838,9.116) 36.307,6.647 36.725,7.066 36.725,7.075 R24.1
RESERVED: P1.8 P1.9 P1.10 | length 5.1
  Top Layer w0.5: P1.10 P1.9 P1.8
SOURCE: P1.4 P1.5 P1.6 VT9.3 | length 10.6
  Top Layer w0.5: P1.6 P1.5 P1.4 31.35,9.805 VT9.3
VCC: P1.1 P1.2 P1.3 R6.2 R15.2 R18.1 R24.2 VT7.3 VT9.4 | length 81.9
  Top Layer w1: P1.3 P1.2 P1.1 38.97,11.67 VT9.4
  Bottom Layer w0.5: R6.2 5.1,10.875 5.1,10.66 ccw(c6.566,10.662) 5.529,9.625 5.531,9.624 7.69,7.464 7.693,7.462 cw(c5.163,4.934) 8.739,4.934 8.739,4.104 8.739,4.102 ccw(c10.226,4.102) 9.175,3.05 9.176,3.049 9.808,2.417 9.81,2.415 ccw(c11.235,3.84) 11.235,1.825 11.236,1.825 30.483,1.825 30.484,1.825 ccw(c30.484,4.144) 32.125,2.505 P1.3 ; R18.1 33.616,17.025 33.666,16.975 33.799,16.975 34.22,16.554 ccw(c35.861,18.197) 35.861,15.875 35.862,15.875 36.934,15.875 cw(c36.934,13.515) 38.603,15.184 38.605,15.182 40.643,13.143
  Bottom Layer w1: P1.3 P1.2 P1.1 ; P1.1@39.025,4.325 39.025,8.325 39.025,10.118 cw(c42.428,10.115) 40.023,12.523 40.643,13.143 42.224,14.724 cw(c45.665,11.285) 45.665,16.15 46.925,16.15 R15.2
pads on no net: DD1.2 DD1.8 DD1.9 DD1.10 DD1.11 DD1.12 DD1.13 U2.5 U2.6 U2.7

## Polygon pours and split planes (outlines as drawn)
GND on Top Layer "NONET_L-01_P-001" (solid, pour order 4): 50,0 50,35 0,35 0,0
VCC on Top Layer "NONET_L-01_P-001" (solid, remove dead copper, pour order 2): 39.95,3.375 39.95,6.329 42.875,9.254 42.875,16.954 34.691,16.954 34.691,8.741 33.063,7.113 33.063,3.935 33.617,3.375
SOURCE on Top Layer "NONET_L-01_P-001" (solid, pour order 3): 32.896,10.618 32.896,8.779 32.172,8.055 32.172,3.858 31.69,3.375 25.975,3.375 25.425,3.925 25.425,7.198 28.84,10.612
GND on Bottom Layer "NONET_L-01_P-001" (solid, remove dead copper, pour order 0): 0,0 0,35 50,35 50,0

## Keep-outs
Keep-Out Layer:
  circle w0.254: c5,5 r1.5
  circle w0.254: c45,5 r1.5
  lines w0.254: 5,0 cw(c5,5) 0,5 0,30 cw(c5,30) 5,35 45.021,35 ; 5.014,0 45,0 ccw(c45,5) 50,5 50,30 ccw(c45,30) 45,35

## Silkscreen, mask and mechanical layers (free items; w line width, h text height)
Top Overlay:
  circle w1: c5,5 r2.2
  circle w1: c45,5 r2.2
Bottom Overlay:
  text "S" at 25.879,2.104 h0.8 r270
  text "S" at 28.481,1.987 h0.8 r270
  text "S" at 30.945,1.987 h0.8 r270
  text "NC" at 15.668,1.379 h0.8 r270
  text "NC" at 18.31,1.354 h0.8 r270
  text "NC" at 20.85,1.354 h0.8 r270
  text "IN" at 23.404,1.329 h0.8 r270
  text "GND" at 10.604,0.779 h0.8 r270
  text "GND" at 13.139,0.729 h0.8 r270
  text "VCC" at 35.904,0.729 h0.8 r270
  text "VCC" at 33.47,0.679 h0.8 r270
  text "VCC" at 38.579,0.679 h0.8 r270

## Text inside footprints (layer, text, board x,y; h text height)
P1: Top Overlay "12" at 8.16,3.7 h1.02